# EAGLE board Schematic (EAGLE 8.7.1)
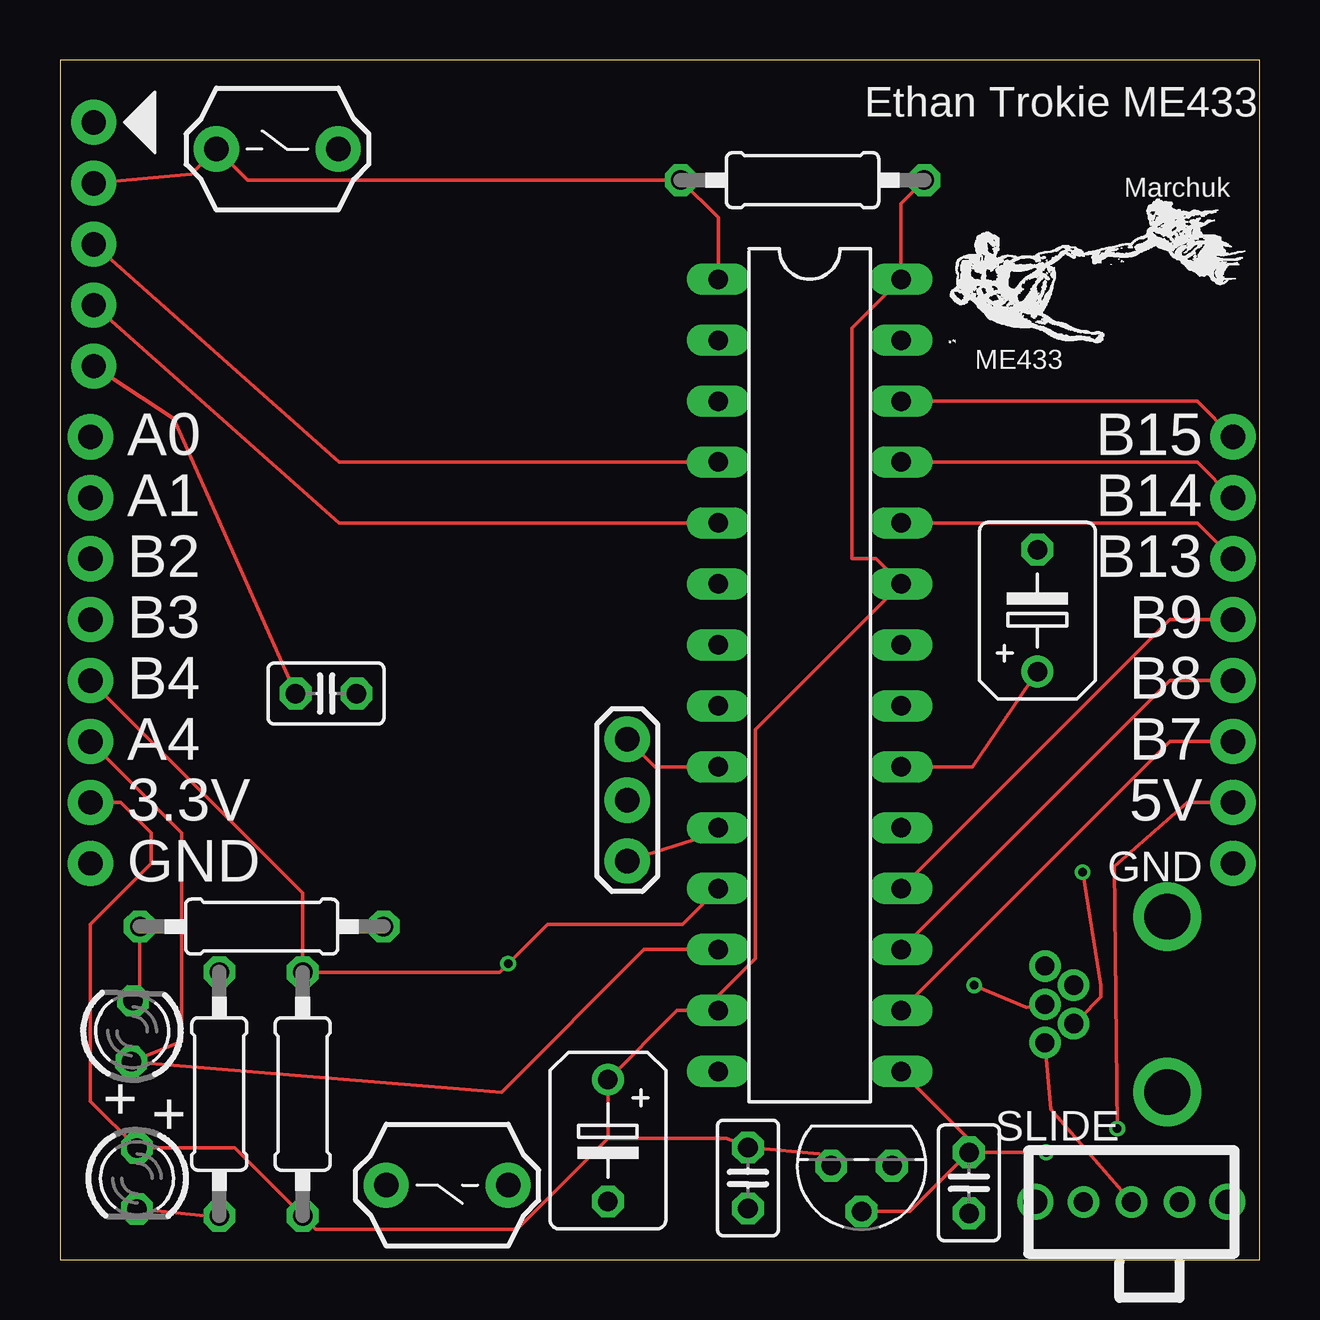
[diagram p0: board, top side]
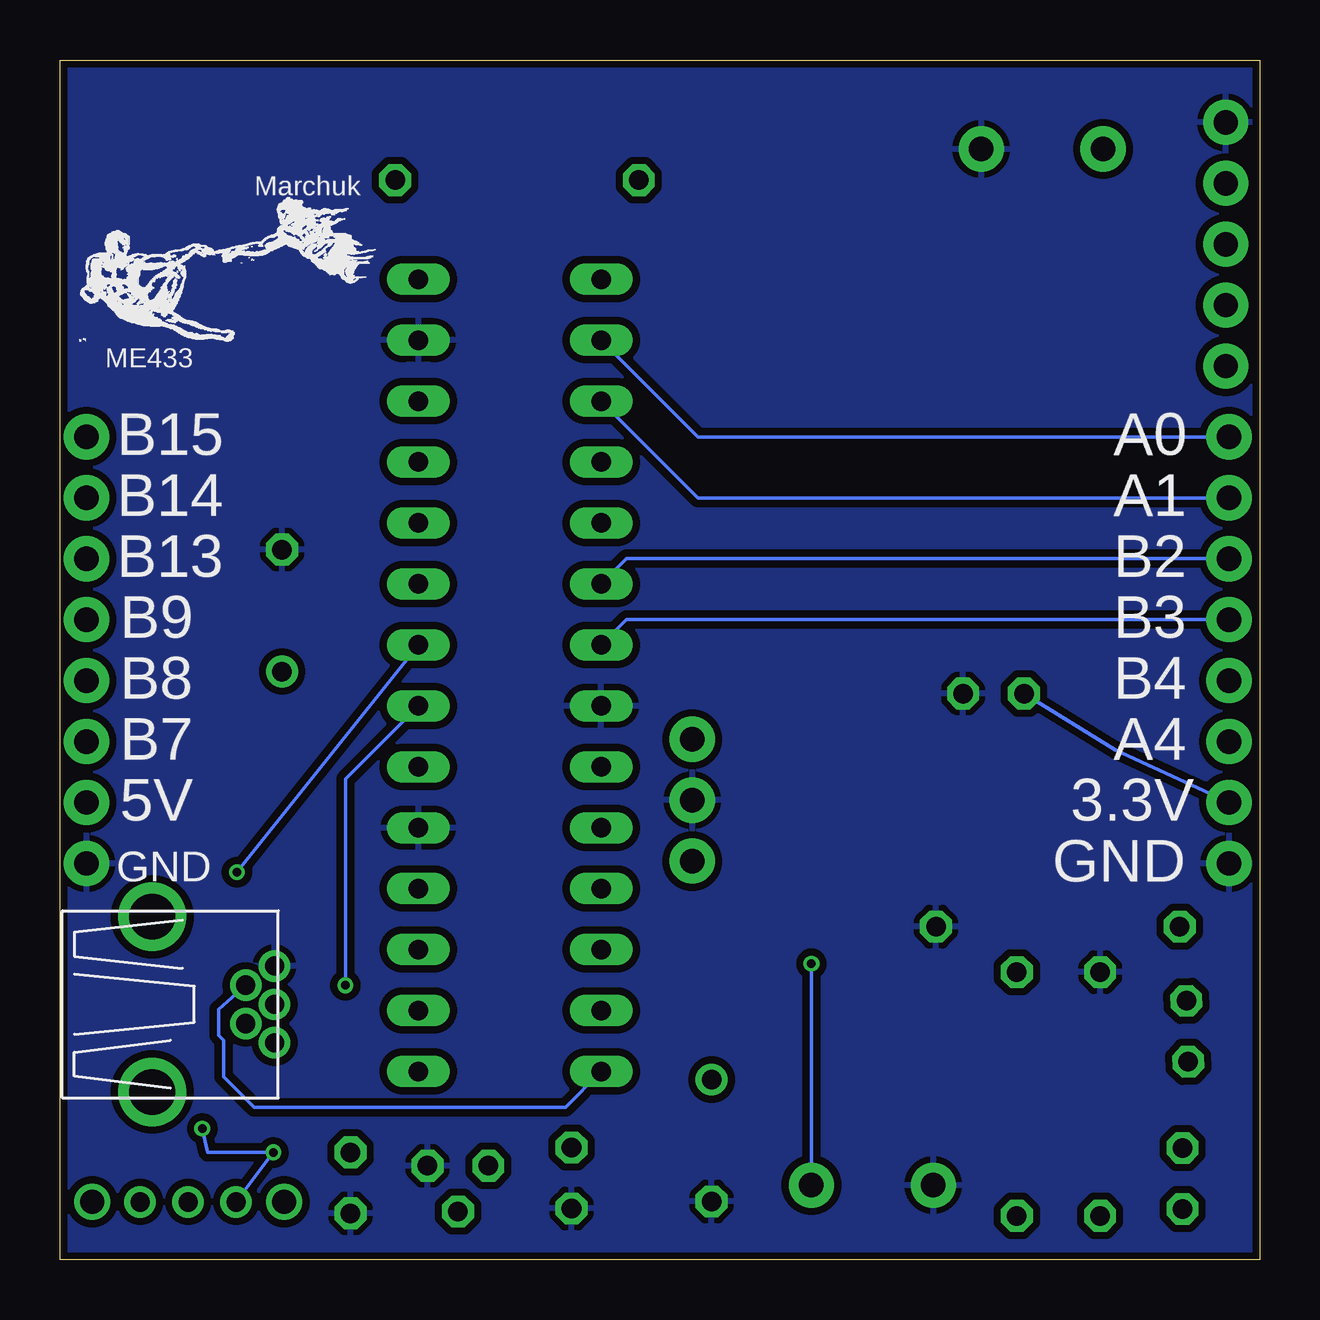
[diagram p1: board, bottom side, seen from below]

Size 50 x 50 mm. Coordinates in mm from the lower left corner, seen from the top.
Outline: 0,0 50,0 50,50 0,50 0,0
Copper layers (1*16): Top 0.035mm / dielectric 1.5mm / Bottom 0.035mm
Design rules "SeeedStudio_2layer_DRU_no_angle_20140221": minimum track width 6mil, minimum drill 12mil, track to track 6mil, track to pad 6mil, pad to pad 6mil, via to via 6mil, smd to smd 0mil, copper to edge 10mil, drill to drill 10mil, minimum pad ring 10mil, minimum via ring 6mil, stop-mask expansion 2mil, vias tented up to drill 100mil, thermal gap 10mil

## Footprints (pad centres in the part's own frame; a part is rotated, then mirrored left to right if it is on the bottom)
1X08 = drill 1.016 pad 1.88: 1 0,0; 2 2.54,0; 3 5.08,0; 4 7.62,0; 5 10.16,0; 6 12.7,0; 7 15.24,0; 8 17.78,0
C025-025X050 = drill 0.813 octagon: 1 -1.27,0; 2 1.27,0
B45181B = drill 0.813: + -2.54,0 | drill 0.813 octagon: - 2.54,0
USB-MB-H = drill 0.8: D+ 5.1,0; D- 3.9,0.8; GND 5.1,-1.6; ID 3.9,-0.8; VBUS 5.1,1.6 | drill 1.9: P$6 0,-3.65; P$7 0,3.65
LED3MM = drill 0.813 octagon: A -1.27,0; K 1.27,0
0207/10 = drill 0.813 octagon: 1 -5.08,0; 2 5.08,0
DIL28-3 = drill 0.813 long: 1 -16.51,-3.81; 2 -13.97,-3.81; 3 -11.43,-3.81; 4 -8.89,-3.81; 5 -6.35,-3.81; 6 -3.81,-3.81; 7 -1.27,-3.81; 8 1.27,-3.81; 9 3.81,-3.81; 10 6.35,-3.81; 11 8.89,-3.81; 12 11.43,-3.81; 13 13.97,-3.81; 14 16.51,-3.81; 15 16.51,3.81; 16 13.97,3.81; 17 11.43,3.81; 18 8.89,3.81; 19 6.35,3.81; 20 3.81,3.81; 21 1.27,3.81; 22 -1.27,3.81; 23 -3.81,3.81; 24 -6.35,3.81; 25 -8.89,3.81; 26 -11.43,3.81; 27 -13.97,3.81; 28 -16.51,3.81
SLIDE = drill 0.8: 1 -2,0; 2 0,0; 3 2,0 | drill 1: P$1 -4,0; P$2 4,0
TO92 = drill 0.813 octagon: 1 -1.27,0; 2 0,1.905; 3 1.27,0
PB = drill 1.016 pad 1.88: 1 -2.54,0; 3 2.54,0
1X05 = drill 1.016 pad 1.88: 1 0,0; 2 2.54,0; 3 5.08,0; 4 7.62,0; 5 10.16,0
OSC = drill 1.016 pad 1.88: 1 -2.54,0; 2 0,0; 3 2.54,0

## Placement (x,y rotation side)
1CONN  [1X08]  1.27,16.51 90 top
2CONN  [1X08]  48.9,16.51 90 top
C1  0.1uF  [C025-025X050]  11.09,23.59 0 top
C2  0.1uF  [C025-025X050]  28.68,3.4 270 top
C3  0.1uF  [C025-025X050]  37.89,3.19 270 top
C5  10uF  [B45181B]  40.74,27.05 90 top
C6  10uF  [B45181B]  22.84,4.96 270 top
J1  USB-MB-H  [USB-MB-H]  46.16,10.64 180 top
LED1  RED  [LED3MM]  3.21,3.38 270 top
LED2  GREEN  [LED3MM]  3.01,9.51 88.2 top
R1  330  [0207/10]  6.64,6.9 270 top
R2  330  [0207/10]  8.41,13.88 180 top
R3  10k  [0207/10]  30.95,44.99 0 top
R4  10k  [0207/10]  10.12,6.9 270 top
U$1  PIC32MX250F128B  [DIL28-3]  31.25,24.35 270 top
U$2  SLIDE  [SLIDE]  44.66,2.4 180 top
U$3  MCP1702  [TO92]  33.41,3.91 180 top
U$4  RESET  [PB]  9.06,46.29 0 top
U$5  USER  [PB]  16.14,3.1 180 top
U$6  PICKIT3  [1X05]  1.41,47.4 270 top
U$7  8 MHz  [OSC]  23.64,19.15 270 top

## Library data of the parts
1CONN 2CONN = ME433Lib; PROD_ID: CONN-08438
C1-C3 C5 C6 J1 R1-R4 U$1-U$7 = ME433Lib
LED1 LED2 = led

## Nets
+3V3: 1CONN.2 C1.1 C2.1 C6.+ LED1.A R3.2 R4.2 U$1.13 U$1.23 U$1.28 U$3.3 U$6.5
+5V: 2CONN.2 C3.1 U$1.15 U$2.3 U$3.2
A0: 1CONN.8 U$1.2
A1: 1CONN.7 U$1.3
A4/LED: 1CONN.3 LED2.A U$1.12
B2: 1CONN.6 U$1.6
B3: 1CONN.5 U$1.7
B4/USER: 1CONN.4 R4.1 U$1.11 U$5.1
B7: 2CONN.3 U$1.16
B8: 2CONN.4 U$1.17
B9: 2CONN.5 U$1.18
B13: 2CONN.6 U$1.24
B14: 2CONN.7 U$1.25
B15: 2CONN.8 U$1.26
D+: J1.D+ U$1.21
D-: J1.D- U$1.22
GND: 1CONN.1 2CONN.1 C1.2 C2.2 C3.2 C5.- C6.- J1.GND R1.1 R2.1 U$1.8 U$1.19 U$1.27 U$3.1 U$4.3 U$5.3 U$6.1 U$7.2
MCLR: R3.1 U$1.1 U$4.1 U$6.2
N$1: J1.VBUS U$2.2
N$2: LED1.K R1.2
N$3: U$1.9 U$7.1
N$4: U$1.10 U$7.3
N$5: C5.+ U$1.20
N$7: LED2.K R2.2
PGEC: U$1.5 U$6.4
PGED: U$1.4 U$6.3
USBID: J1.ID U$1.14

## Tracks (layer width: path | path; a pad name or v marks a point on that pad's centre or on a via)
+3V3
  Top 0.152: R3.2 35.06,44.02 U$1.28 33.02,38.82 33.02,29.21 34.01,29.21 U$1.23 28.99,22.09 28.99,12.55 27.44,11 U$1.13 25.72,10.38 C6.+ 22.84,5.06 | 22.84,5.06 19.05,1.27 10.66,1.27 R4.2 7.28,4.65 LED1.A 1.27,6.59 1.27,13.97 3.81,16.51 3.81,17.78 2.54,19.05 1CONN.2 | U$3.3 31.64,4.42 C2.1 27.78,5.06 22.84,5.06 | U$6.5 4.74,35.05 C1.1
  Bottom 0.152: 1CONN.2 6.01,21.25 C1.1
+5V  (via drill 0.35)
  Top 0.152: C3.1 v41.1,4.46 | C3.1 35.43,2 U$3.2 | U$1.15 37.89,5.01 C3.1 | v44.07,5.46 43.94,16.38 46.99,19.05 2CONN.2
  Bottom 0.152: U$2.3 v41.1,4.46 43.84,4.46 v44.07,5.46
A0
  Bottom 0.152: 1CONN.8 12.7,34.29 23.41,34.29 U$1.2
A1
  Bottom 0.152: 1CONN.7 23.41,31.75 U$1.3
A4/LED
  Top 0.152: U$1.12 24.35,12.92 18.41,6.97 LED2.A 5.08,9.09 5.08,17.78 1CONN.3
B2
  Bottom 0.152: 1CONN.6 26.39,29.21 U$1.6
B3
  Bottom 0.152: 1CONN.5 26.39,26.67 U$1.7
B4/USER  (via drill 0.35)
  Top 0.152: U$1.11 25.95,13.97 20.32,13.97 v18.68,12.33 18.33,11.98 R4.1 10.12,15.29 1CONN.4
  Bottom 0.152: U$5.1 v18.68,12.33
B7
  Top 0.152: U$1.16 46.27,21.59 2CONN.3
B8
  Top 0.152: U$1.17 46.27,24.13 2CONN.4
B9
  Top 0.152: U$1.18 46.27,26.67 2CONN.5
B13
  Top 0.152: U$1.24 47.41,30.7 2CONN.6
B14
  Top 0.152: U$1.25 47.41,33.24 2CONN.7
B15
  Top 0.152: U$1.26 47.41,35.78 2CONN.8
D+  (via drill 0.35)
  Top 0.152: v38.1,11.43 40.29,10.51 J1.D+
  Bottom 0.152: U$1.21 38.1,20.04 v38.1,11.43
D-  (via drill 0.35)
  Top 0.152: v42.63,16.14 43.39,11.43 43.39,10.94 42.51,10.06 J1.D-
  Bottom 0.152: U$1.22 v42.63,16.14
GND
  pour Bottom (isolate 0.305): -2.27,51 -2.27,-2 52.27,-2 52.27,51
MCLR
  Top 0.152: U$6.2 5.47,45.24 U$4.1 7.82,44.99 R3.1 27.44,43.42 U$1.1
N$1
  Top 0.152: J1.VBUS 41.31,6.26 U$2.2
N$2
  Top 0.152: LED1.K 6.04,1.82 R1.2
N$3
  Top 0.152: U$1.9 24.79,20.54 U$7.1
N$4
  Top 0.152: U$7.3 27.19,17.75 U$1.10
N$5
  Top 0.152: U$1.20 38.04,20.54 C5.+
N$7
  Top 0.152: R2.2 3.33,11.06 LED2.K
PGEC
  Top 0.152: U$6.4 11.63,30.7 U$1.5
PGED
  Top 0.152: U$6.3 11.63,33.24 U$1.4
USBID
  Bottom 0.152: J1.ID 43.39,10.43 43.39,9.34 43.18,9.13 43.18,7.62 41.91,6.35 28.93,6.35 U$1.14

## Text on the board
tPlace: Ethan Trokie ME433 | Marchuk | ME433 | A0 | B15 | A1 | B14 | B2 | B13 | B3 | B9 | B4 | B8 | A4 | B7 | 3.3V | 5V | GND | GND | + | +
bPlace: Marchuk | ME433 | A0 | B15 | A1 | B14 | B2 | B13 | B3 | B9 | B4 | B8 | A4 | B7 | 3.3V | 5V | GND | GND